# Altium PCB XP_Driver.PcbDoc
Units mil, origin at the board's own origin, x right, y up, seen from the top; angles counter-clockwise.
Board outline 2322.83 x 1614.17 mil, 2 copper layers (Top Layer, Bottom Layer); 22 components, 20 nets, 92 pads, 1 vias.
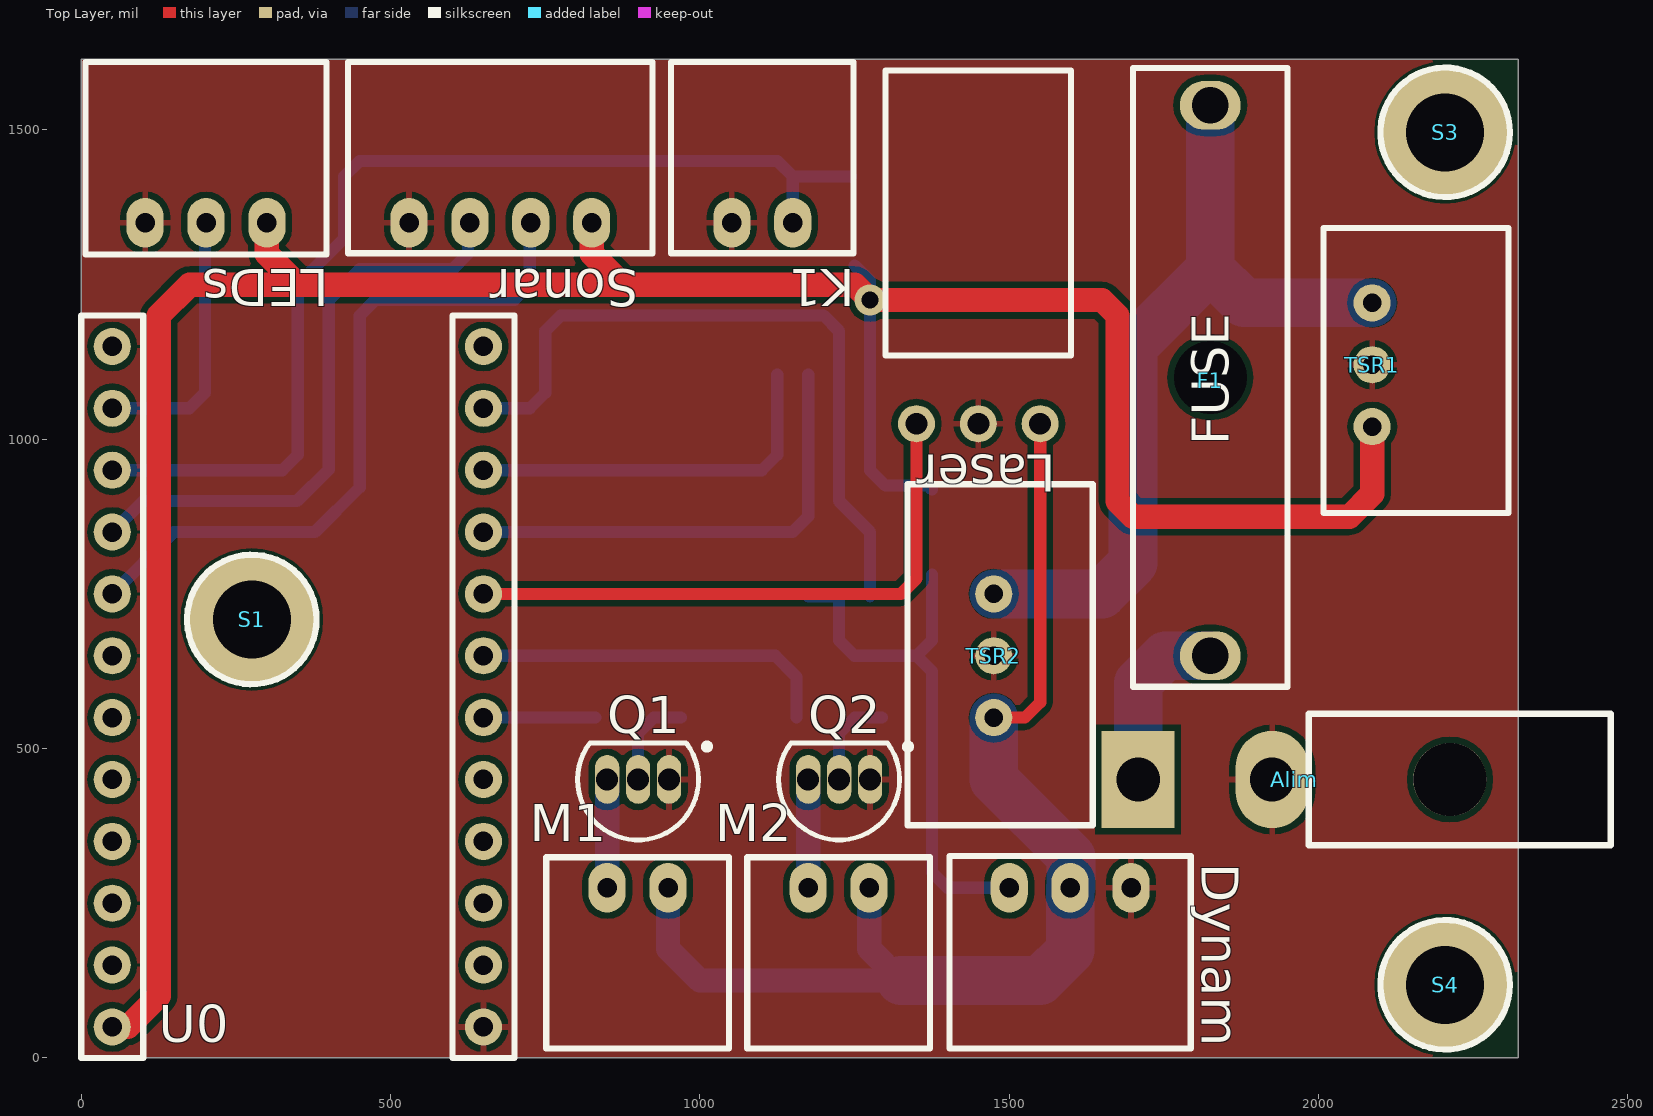
[diagram p0: Top Layer view]
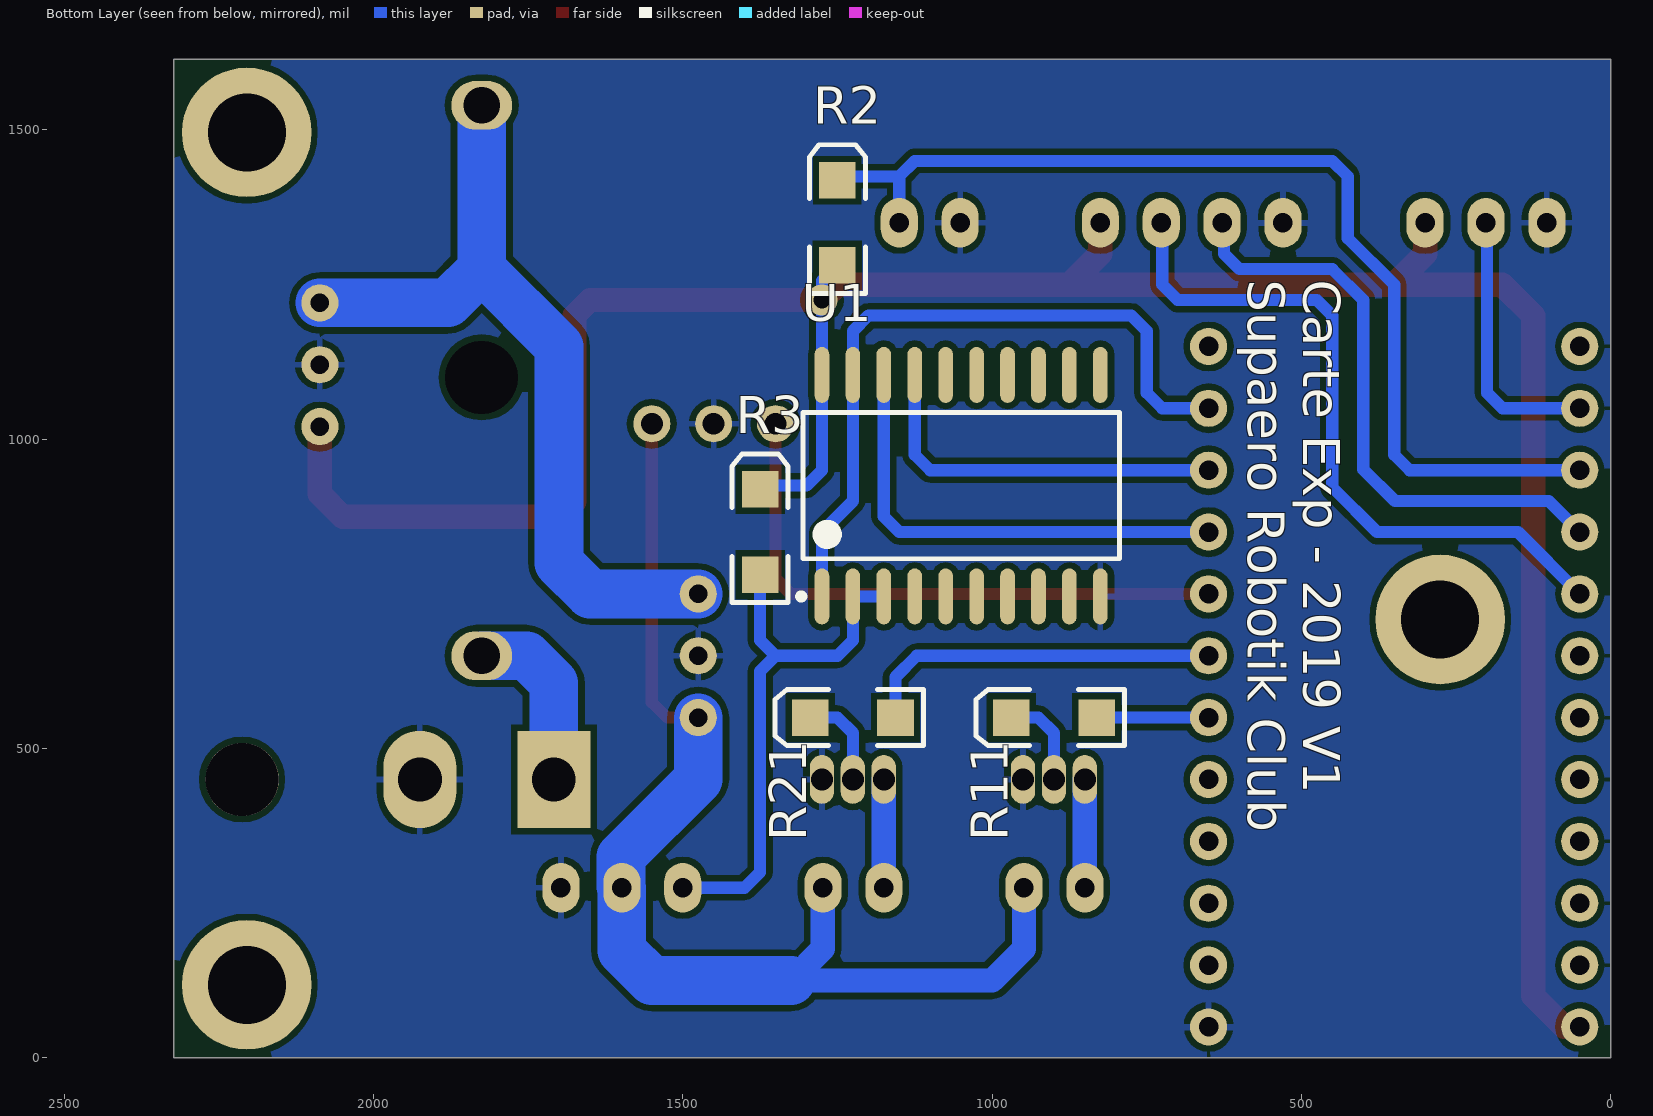
[diagram p1: Bottom Layer view, seen from below]

## Layer stack, top to bottom
Top Solder: solder mask 0.4, Solder Resist, Dk 3.5
Top Layer: signal copper 1.4
Dielectric 1: dielectric 12.6, FR-4, Dk 4.8
Bottom Layer: signal copper 1.4
Bottom Solder: solder mask 0.4, Solder Resist, Dk 3.5

## Board outline
0,0 2322.83,0 2322.83,1614.17 0,1614.17

## Design rules (kind name [scope] priority, off if disabled: settings)
Clearance [All] p1: gap=10
PolygonConnect [All] p1: connectstyle=Relief reliefconductorwidth=10 reliefentries=4 polygonreliefangle="90 Angle" airgapwidth=10
RoutingVias [All] p1: holewidth=28 width=50 viastyle="Through Hole" minholewidth=28 minwidth=50 maxholewidth=28 maxwidth=50
SolderMaskExpansion [All] p1: expansion=4
Width [All] p1: maxlimit=78.74 minlimit=9.84 preferedwidth=19.68
30 further rules are at their usual default settings.

## Components (designator, comment, footprint, x,y, rotation, side; value= is the part's Value field where it differs from the comment)
Alim "Header 2H" Molex_MiniFitJr_2x1H 1925,450 r0 top
Dynam "Header 3H" "Molex SPOX 3x1H" 1500,275 r0 top
F1 "Fuse 1" Fuse 1825,650 r90 top
K1 "Header 2H" "Molex SPOX 2x1H" 1150,1350 r180 top
Laser "Header 3H" "MOLEX KK254 3X1H M" 1550,1025 r180 top
LEDs "Header 3H" "Molex SPOX 3x1H" 300,1350 r180 top
M1 "Header 2H" "Molex SPOX 2x1H" 850,275 r0 top
M2 "Header 2H" "Molex SPOX 2x1H" 1175,275 r0 top
Q1 "BC548C" TO-92A 900,450 r90 top
Q2 "BC548C" TO-92A 1225,450 r90 top
R2 "Res2" 3.2X1.6X1.1 1250,1350 r90 bottom
R3 "Res2" 3.2X1.6X1.1 1375,850 r90 bottom
R11 "Res2" 3.2X1.6X1.1 900,550 r0 bottom
R21 "Res2" 3.2X1.6X1.1 1225,550 r0 bottom
S1 "Screw M3" "Screw M3" 275.59,708.66 r0 top
S3 "Screw M3" "Screw M3" 2204.72,1496.06 r0 top
S4 "Screw M3" "Screw M3" 2204.72,118.11 r0 top
Sonar "Header 4H" "Molex SPOX 4x1H" 825,1350 r180 top
TSR1 "TSR 1-2450" TRS 2086.61,1220.47 r90 top
TSR2 "TSR 2-24120" "TRS - centered" 1475,750 r90 top
U0 "Teensy2.0" Teensy2.0 650,50 r180 top locked
U1 "SN74LS241DW" DW020_N 1050,925 r90 bottom

## Footprints (in the part's own frame and the unit in brackets; to place one, negate y for a bottom-side part, rotate by r counter-clockwise, add the part's x,y. Pads: shape width x height; smd on the part's side, far side on the other; paste and mask are expansions set on the pad)
3.2X1.6X1.1 [mm] "SMT LED; 2 Flat Leads"
  rect 1.5x1.5 smd: 1(-1.75,0) 2(1.75,0)
  silkscreen extent -2.9,-1.15 3.2,1.15
DW020_N [mm] "SOIC, 20-Leads, Body 12.8x7.5mm, Pitch 1.27mm, IPC Medium Density"
  oval 2.3x0.6 smd: 1(-4.55,5.715) 2(-4.55,4.445) 3(-4.55,3.175) 4(-4.55,1.905) 5(-4.55,0.635) 6(-4.55,-0.635) 7(-4.55,-1.905) 8(-4.55,-3.175) 9(-4.55,-4.445) 10(-4.55,-5.715) 11(4.55,-5.715) 12(4.55,-4.445) 13(4.55,-3.175) 14(4.55,-1.905) 15(4.55,-0.635) 16(4.55,0.635) 17(4.55,1.905) 18(4.55,3.175) 19(4.55,4.445) 20(4.55,5.715)
  silkscreen extent -4.67,-6.5 3,6.69, body extent -3.75,-6.5 3.75,6.5, height 2.65
Fuse [mm] "Porte-fusible monté sur circuit 10 (UL) A, 6.3 (VDE) A, fusible Cartouche, 893-0574"
  round 2 hole 3: 0(11.43,0)
  oval 2x2.5 hole 1.5: 1(0,0) 2(22.6,0)
  silkscreen extent -1.27,-3.17 24.13,3.18, body extent -1.27,-4.29 24.13,4.29, height 11.41
"MOLEX KK254 3X1H M" [mil]
  round 60 hole 35.43: 1(0,0) 2(100,0) 3(200,0)
  silkscreen extent -50,-571 250,-110, body extent -50,-570 250,11, height 230
"Molex SPOX 2x1H" [mil] "Prise CI, Molex, 3 Contacts, 1 rangée, entraxe 2.5mm, 3A, Coudé, ref 22-03-5035"
  oval 60x80 hole 31.5: 1(0,0) 2(98.43,0)
  silkscreen extent -98,-260 197,49, body extent -98,-262 193,49, height 193
"Molex SPOX 3x1H" [mil] "Prise CI, Molex, 3 Contacts, 1 rangée, entraxe 2.5mm, 3A, Coudé, ref 22-03-5035"
  oval 60x80 hole 31.5: 1(0,0) 2(98.43,0) 3(196.85,0)
  silkscreen extent -96,-260 293,51, body extent -96,-260 293,51, height 193
"Molex SPOX 4x1H" [mil] "Prise CI, Molex, 3 Contacts, 1 rangée, entraxe 2.5mm, 3A, Coudé, ref 22-03-5035"
  oval 60x80 hole 31.5: 1(0,0) 2(98.43,0) 3(196.85,0) 4(295.28,0)
  silkscreen extent -98,-260 394,49, body extent -98,-262 390,49, height 193
Molex_MiniFitJr_2x1H [mm] "Connecteur Molex 2"
  rect 3x4 hole 1.8: 1(-5.5,0)
  oval 3x4 hole 1.8: 2(0,0)
  round 3 hole 3 unplated: 3(7.3,0)
  silkscreen extent 1.5,-2.7 13.9,2.7, body extent -6.03,-2.7 13.9,3.1, height 11.01
"Screw M3" [mm] "M3 iso Screw"
  round 5.32 hole 3.2 unplated: 0(0,0)
  silkscreen extent -2.66,-2.66 2.66,2.66
Teensy2.0 [mil] "Teensy2.0 with minimal"
  round 60 hole 31.5: 1(0,0) 2(0,-100) 3(0,-200) 4(0,-300) 5(0,-400) 6(0,-500) 7(0,-600) 8(0,-700) 9(0,-800) 10(0,-900) 11(0,-1000) 12(0,-1100) 18(600,-1100) 19(600,-1000) 20(600,-900) 21(600,-800) 22(600,-700) 23(600,-600) 24(600,-500) 25(600,-400) 26(600,-300) 27(600,-200) 28(600,-100) 29(600,0)
  silkscreen extent -50,-1150 650,50, body extent -50,-1150 650,50, height 256
TO-92A [mm] "TO, Flat Index; 3 In-Line, Axial Leads; Body Dia. 4.5mm; Leads 0.51 x 0.48 mm (max)"
  oval 2x1 hole 0.9: 1(0,-1.27) 2(0,0) 3(0,1.27)
  silkscreen extent -2.48,-2.96 1.5,2.48, body extent -2.48,-2.5 1.5,2.5, height 6.86
TRS [mil]
  round 60 hole 30: 1(0,0) 2(-100,0) 3(-200,0)
  silkscreen extent -340,-220 121,79, body extent -341,-218 120,78, height 398
"TRS - centered" [mil]
  round 60 hole 30: 1(0,0) 2(-100,0) 3(-200,0)
  silkscreen extent -374,-160 177,139, body extent -374,-157 177,138, height 398

## Part data
Alim K1 M1 M2: "Header, 2-Pin, Right Angle"
Dynam Laser LEDs: "Header, 3-Pin, Right Angle"
F1: "Fuse"
Q1 Q2: library part 2N3904, "NPN General Purpose Amplifier"
R2 R3 R11 R21: "Resistor"
Sonar: "Header, 4-Pin, Right Angle"
TSR1 TSR2: library part "Volt Reg", "Voltage Regulator"
U0: "Teensy 2.0 with minimal pinout"
U1: "Octal Buffer and Line Driver with 3-State Outputs"

## Via types
v1: diameter 50, hole 28, Top Layer to Bottom Layer, 1 vias

## Nets (pads, with @x,y where several pads share a name; then routed paths per layer and width w, separated by ;. In a path a pad name is that pad's centre, name@x,y a point inside that pad or via, vN(x,y) a via of type N, cw(c..) or ccw(c..) an arc to the next point about the centre after c; other vN are vias at no path point)
5V_L: LEDs.1 R2.1 R3.2 Sonar.1 TSR1.3 U0.29 U1.20 | length 4328.9
  Top Layer w39.37: U0.29 75,50 125,100 125,1200 175,1250 350,1250 ; LEDs.1 300,1300 350,1250 ; Sonar.1 825,1300 875,1250 ; TSR1.3 2086.61,911.61 2050,875 1700,875 1675,900 1675,1200 1650,1225 v1(1275,1225) 1250,1250 875,1250 ; 350,1250 875,1250
  Bottom Layer w19.68: R2.1 1275,1256.1 v1(1275,1225) U1.20 1275,950 1300,925 1368.9,925 R3.2
12V_A: Dynam.2 Laser.1 M1.2 M2.2 TSR2.3 | length 1925.6
  Top Layer w19.68: TSR2.3 1525,550 1550,575 Laser.1
  Bottom Layer w39.37: M1.2 948.43,176.57 1000,125 1325,125 1273.43,176.57 M2.2
  Bottom Layer w78.74: 1325,125 1550,125 1598.43,173.43 Dynam.2 1600,276.57 1600,325 1475,450 TSR2.3
DYN_CTRL: U0.11 U1.1 U1.19 | length 1155.9
  Bottom Layer w19.68: U0.11 725,1050 750,1075 750,1175 775,1200 1200,1200 1225,1175 U1.19 1225,900 1275,850 U1.1
DYN_DATA: Dynam.1 R3.1 U1.2 U1.3 | length 893.4
  Bottom Layer w19.68: U1.3 U1.2 1225,675 1250,650 1350,650 ; R3.1 1375,675 1350,650 ; Dynam.1 1400,275 1375,300 1375,625 1350,650
DYN_RX: U0.9 U1.18 | length 764.5
  Bottom Layer w19.68: U0.9 1150,850 1175,875 U1.18
DYN_TX: U0.10 U1.17 | length 614.5
  Bottom Layer w19.68: U0.10 1100,950 1125,975 U1.17
GND: Alim.2 Dynam.3 K1.2 Laser.2 LEDs.3 Q1.1 Q2.1 Sonar.4 TSR1.2 TSR2.2 U0.1 U1.10
K1: K1.1 R2.2 U0.20 | length 1706
  Bottom Layer w19.68: U0.20 325,950 350,975 350,1250 425,1325 425,1425 450,1450 1125,1450 1150,1425 ; K1.1 1150,1425 ; R2.2@1243.9,1425 1150,1425
LASER: Laser.3 U0.8 | length 960.4
  Top Layer w19.68: U0.8 1325,750 1350,775 Laser.3
LEDS: LEDs.2 U0.19 | length 436
  Bottom Layer w19.68: U0.19 175,1050 200,1075 200,1348.43 LEDs.2
M1: R11.1 U0.6 | length 181.1
  Bottom Layer w19.68: U0.6 R11.1
M2: R21.1 U0.7 | length 585.9
  Bottom Layer w19.68: U0.7 1121.65,650 1156.1,615.55 R21.1
NetM1_2: M1.1 Q1.3 | length 175
  Bottom Layer w39.37: M1.1 Q1.3
NetM2_2: M2.1 Q2.3 | length 175
  Bottom Layer w39.37: M2.1 Q2.3
NetQ1_2: Q1.2 R11.2 | length 154.3
  Bottom Layer w19.68: Q1.2 900,525 925,550 R11.2
NetQ2_2: Q2.2 R21.2 | length 154.3
  Bottom Layer w19.68: Q2.2 1225,525 1250,550 R21.2
S1_ECHO: Sonar.3 U0.21 | length 973.1
  Bottom Layer w19.68: U0.21 100,900 348.82,900 400,951.18 400,1225 450,1275 600,1275 625,1300 625,1346.85 Sonar.3
S1_TRIG: Sonar.2 U0.22 | length 1145.3
  Bottom Layer w19.68: U0.22 150,850 377.56,850 450,922.44 450,1200 475,1225 700,1225 725,1250 725,1348.43 Sonar.2
V_BAT: Alim.1 F1.1 | length 290.8
  Bottom Layer w78.74: Alim.1 1708.46,606.1 1752.36,650 F1.1
V_BAT_P: F1.2 TSR1.1 TSR2.1 | length 1321.5
  Bottom Layer w78.74: TSR2.1 1650,750 1700,800 1700,1150 1825,1275 ; F1.2 1825,1275 ; TSR1.1 1879.53,1220.47 1825,1275
pads on no net: Alim.3 F1.0 S1.0 S3.0 S4.0 U0.2 U0.3 U0.4 U0.5 U0.12 U0.18 U0.23 U0.24 U0.25 U0.26 U0.27 U0.28 U1.4 U1.5 U1.6 U1.7 U1.8 U1.9 U1.11 U1.12 U1.13 U1.14 U1.15 U1.16

## Polygon pours and split planes (outlines as drawn)
GND on Top Layer "Top GND_L" (solid, remove dead copper, pour order 0): 0,1614.17 2322.83,1614.17 2322.83,0 0,0
GND on Bottom Layer "Bot GND_L" (solid, remove dead copper, pour order 2): 0,0 2322.83,0 2322.83,1614.17 0,1614.17

## Silkscreen, mask and mechanical layers (free items; w line width, h text height)
Bottom Overlay:
  text "Carte Exp - 2019 V1 / Supaero Robotik Club" at 586.81,1258.07 h60 r90
Mechanical 2:
  the board outline again, w10

## Dimensions
0,0 to 0,1614.17 on Mechanical 3
0,0 to 2322.83,0 on Mechanical 3

## Text inside footprints (layer, text, board x,y; h text height)
F1: Top Overlay "FUSE" at 1855,990 h60 r90